# Altium PCB PCB_meteo.PcbDoc
Units mm, origin at the board's own origin, x right, y up, seen from the top; angles counter-clockwise.
Board outline 50 x 50 mm, 4 copper layers (Top Layer, Internal Plane 1, Internal Plane 2, Bottom Layer); 29 components, 11 nets, 131 pads, 28 vias.
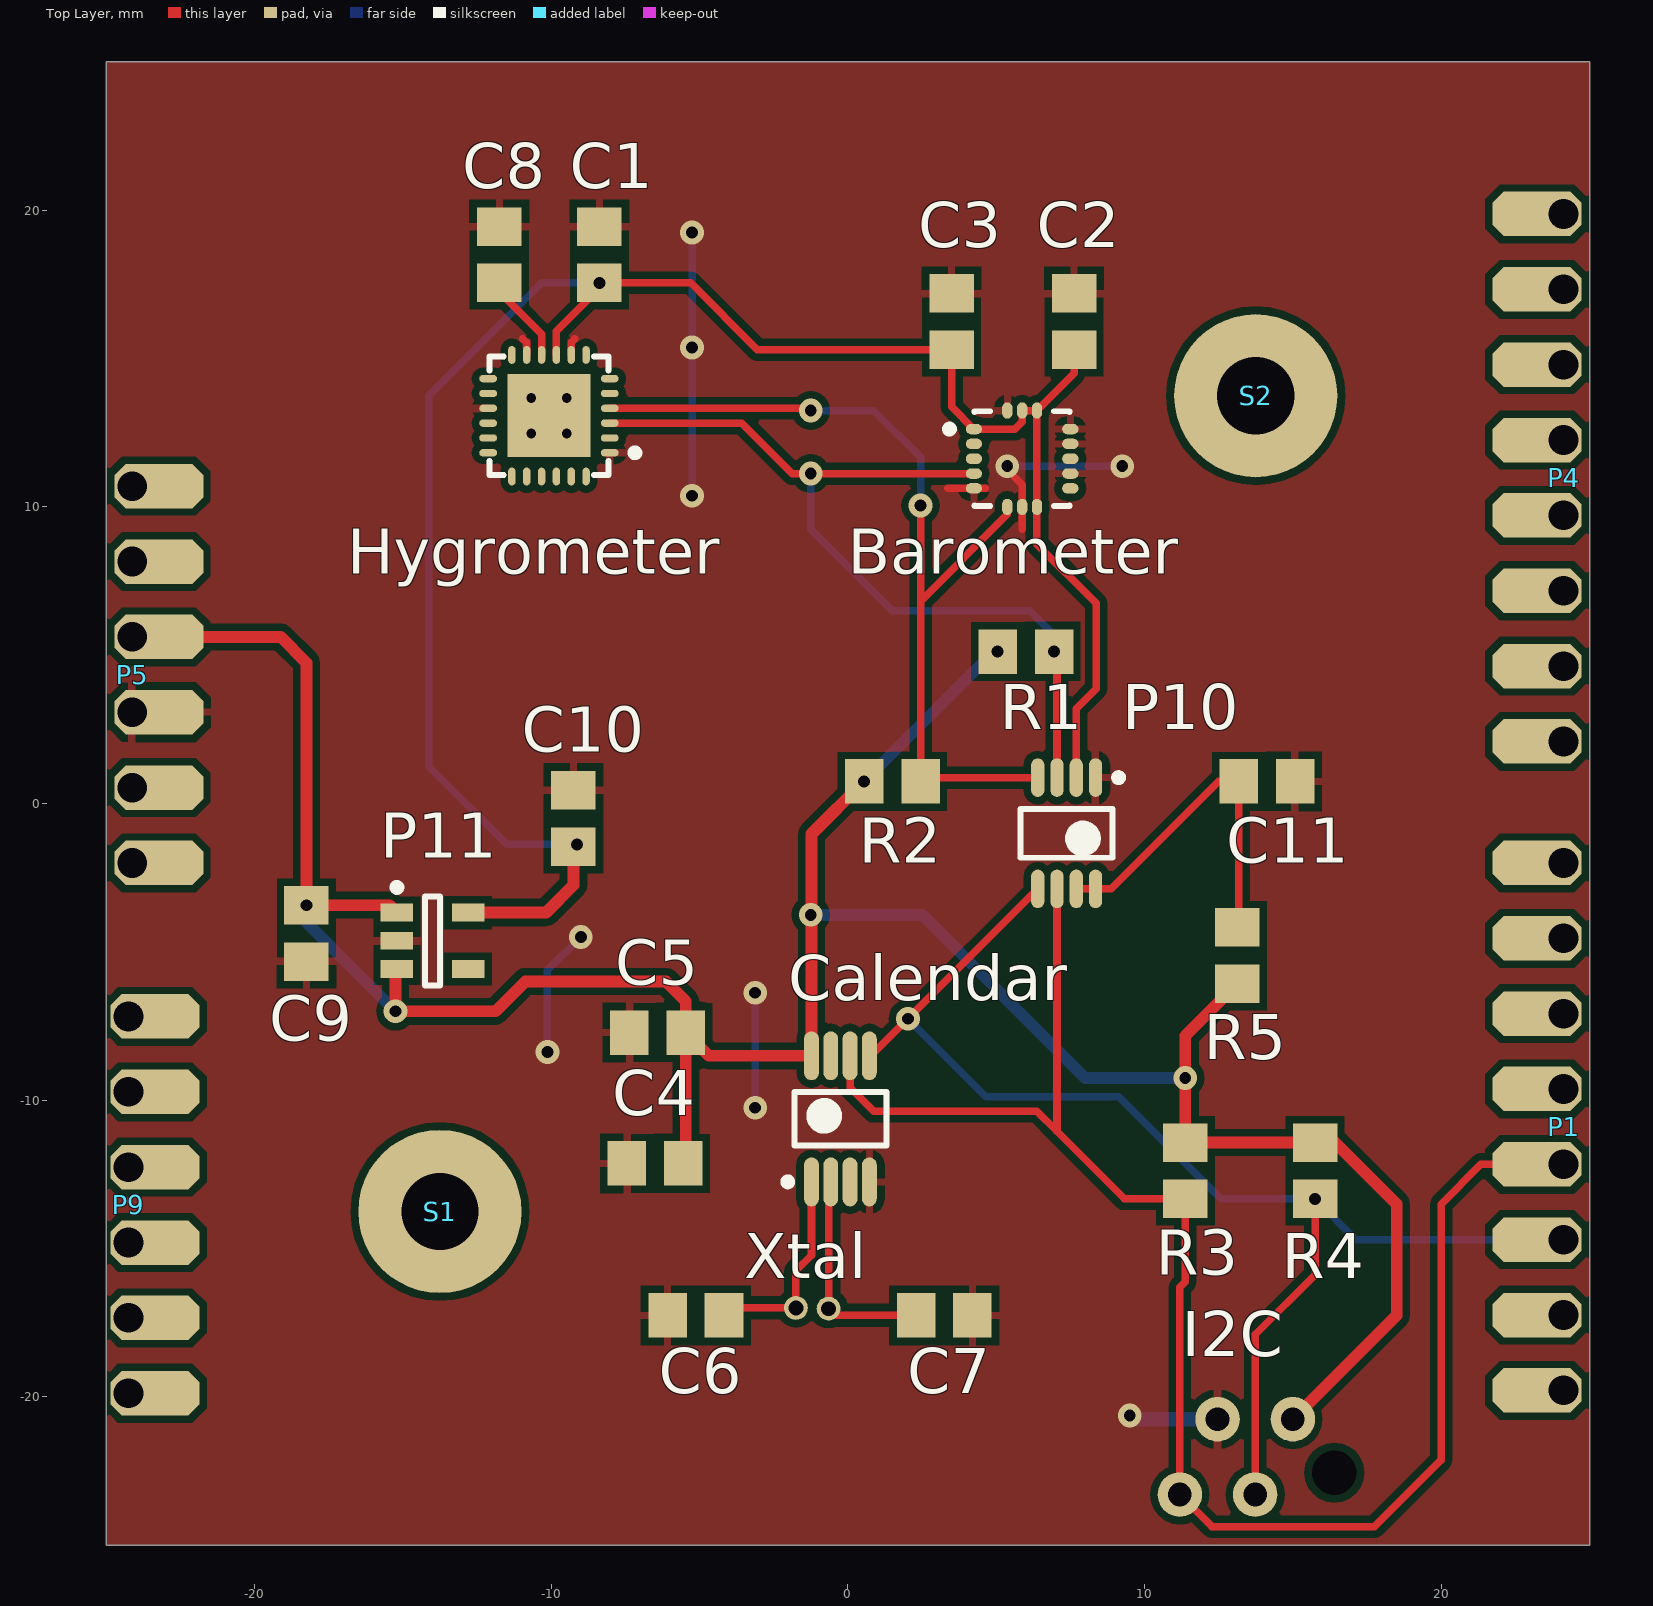
[diagram p0: Top Layer view]
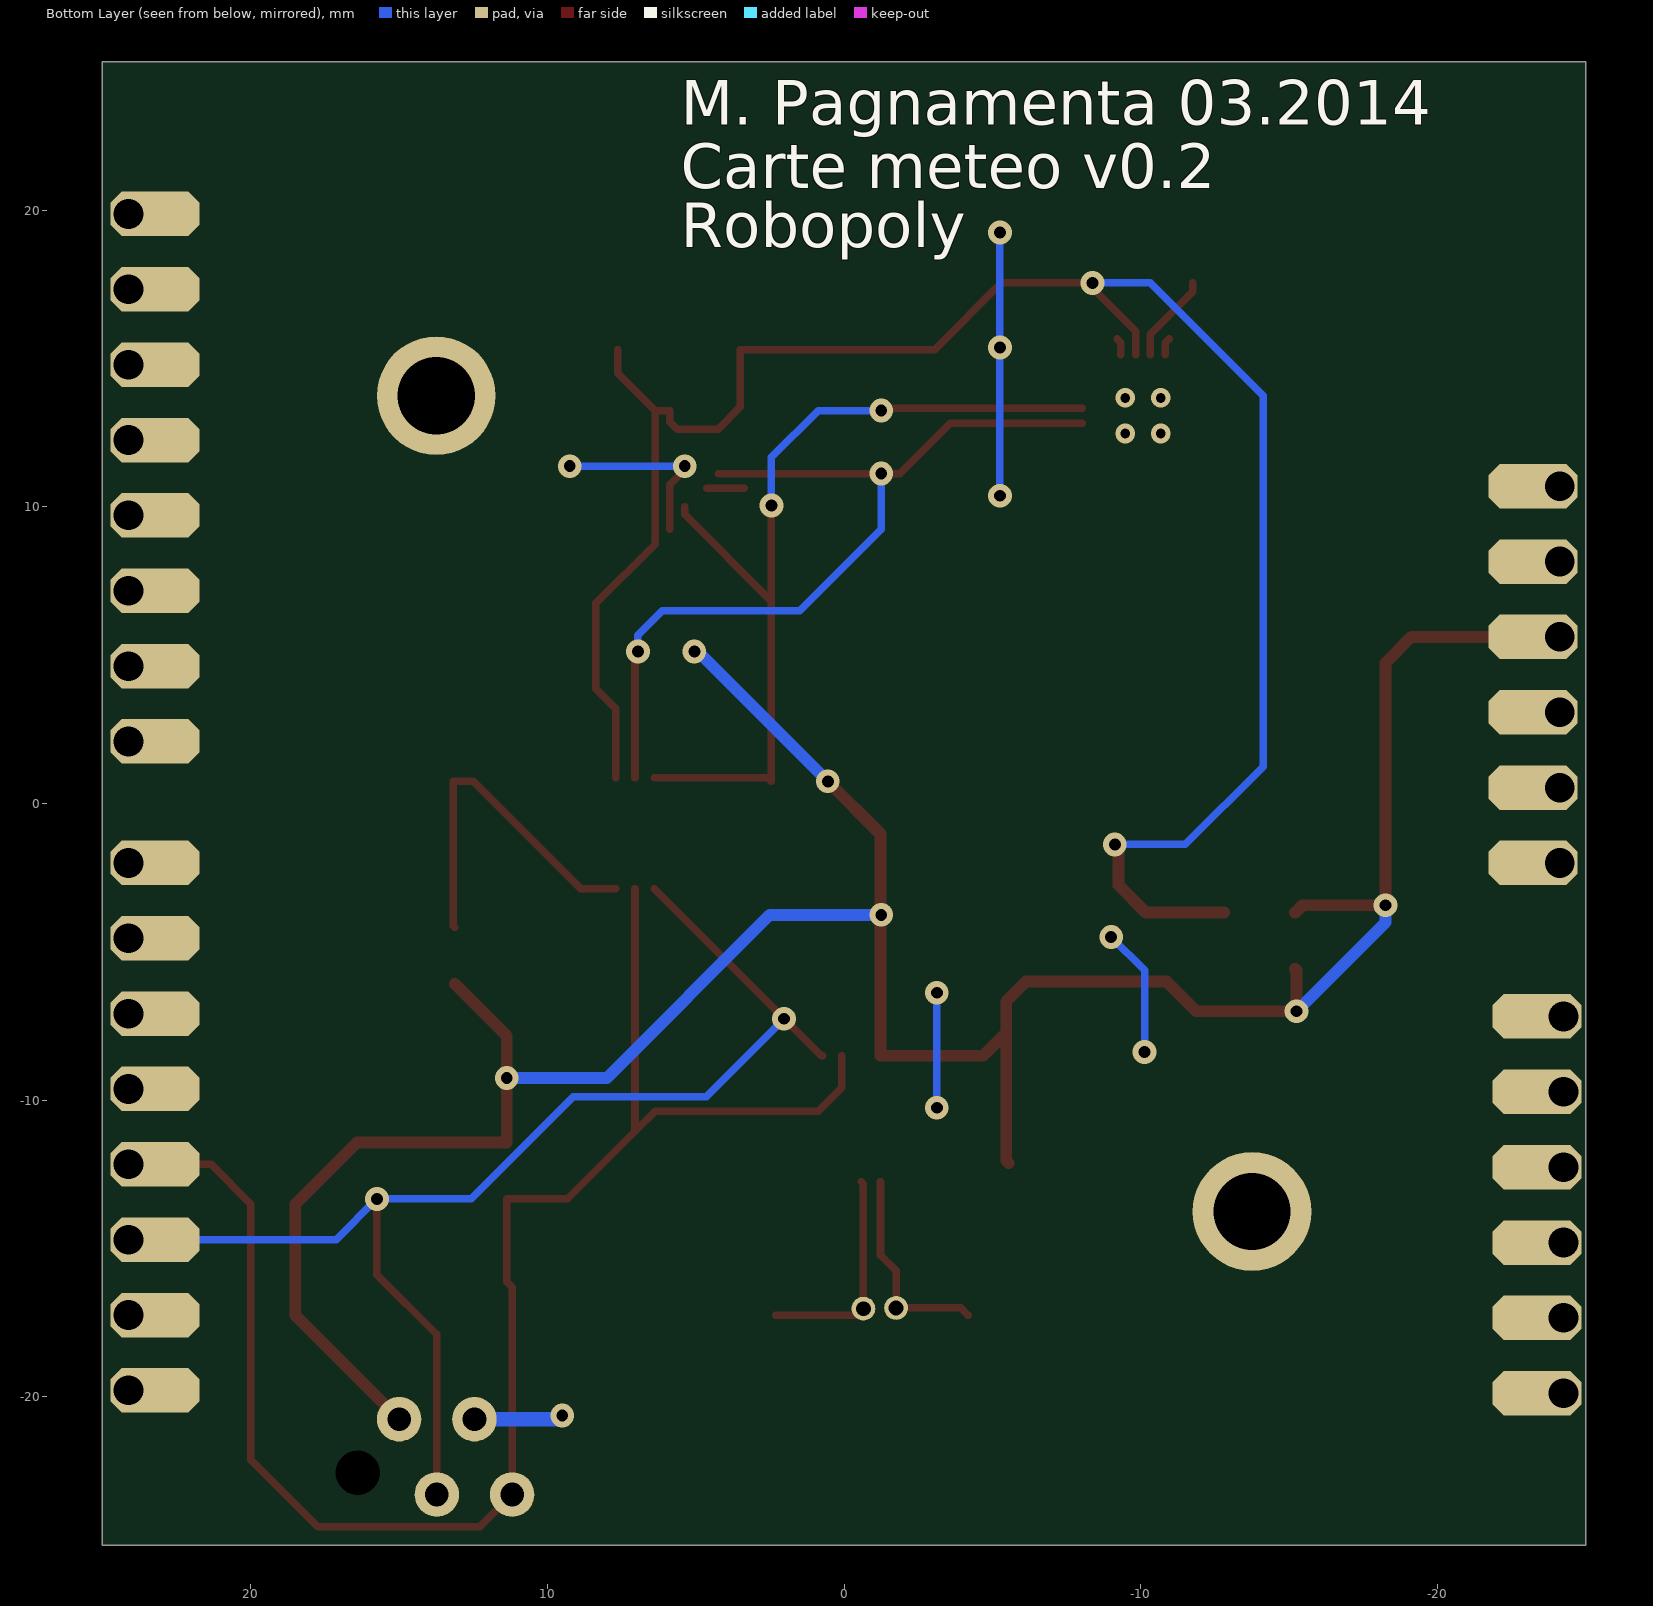
[diagram p1: Bottom Layer view, seen from below]
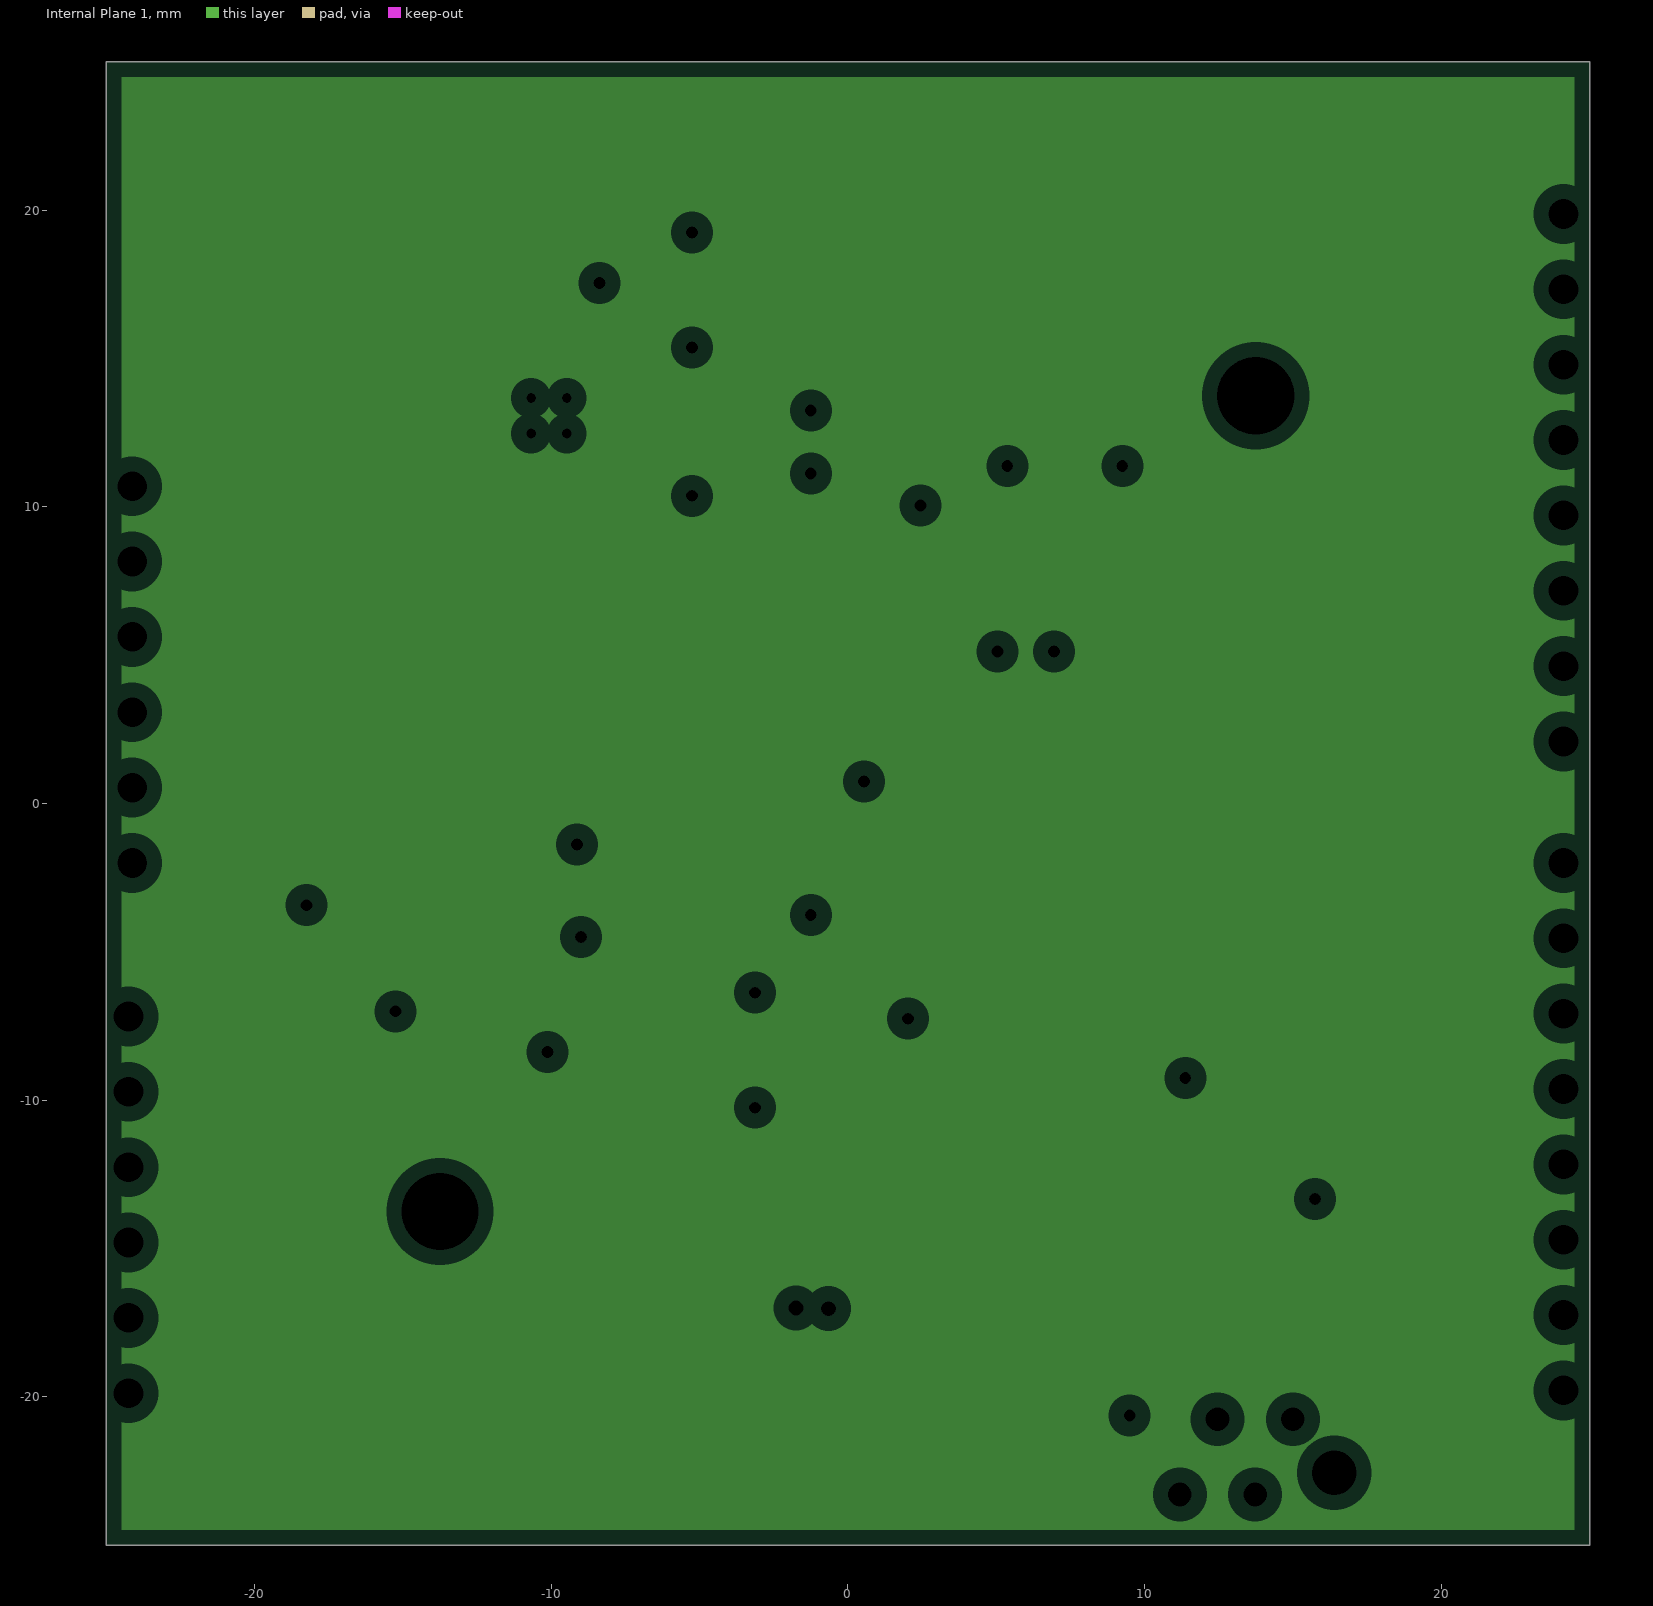
[diagram p2: Internal Plane 1, clearances drawn from the general rule]
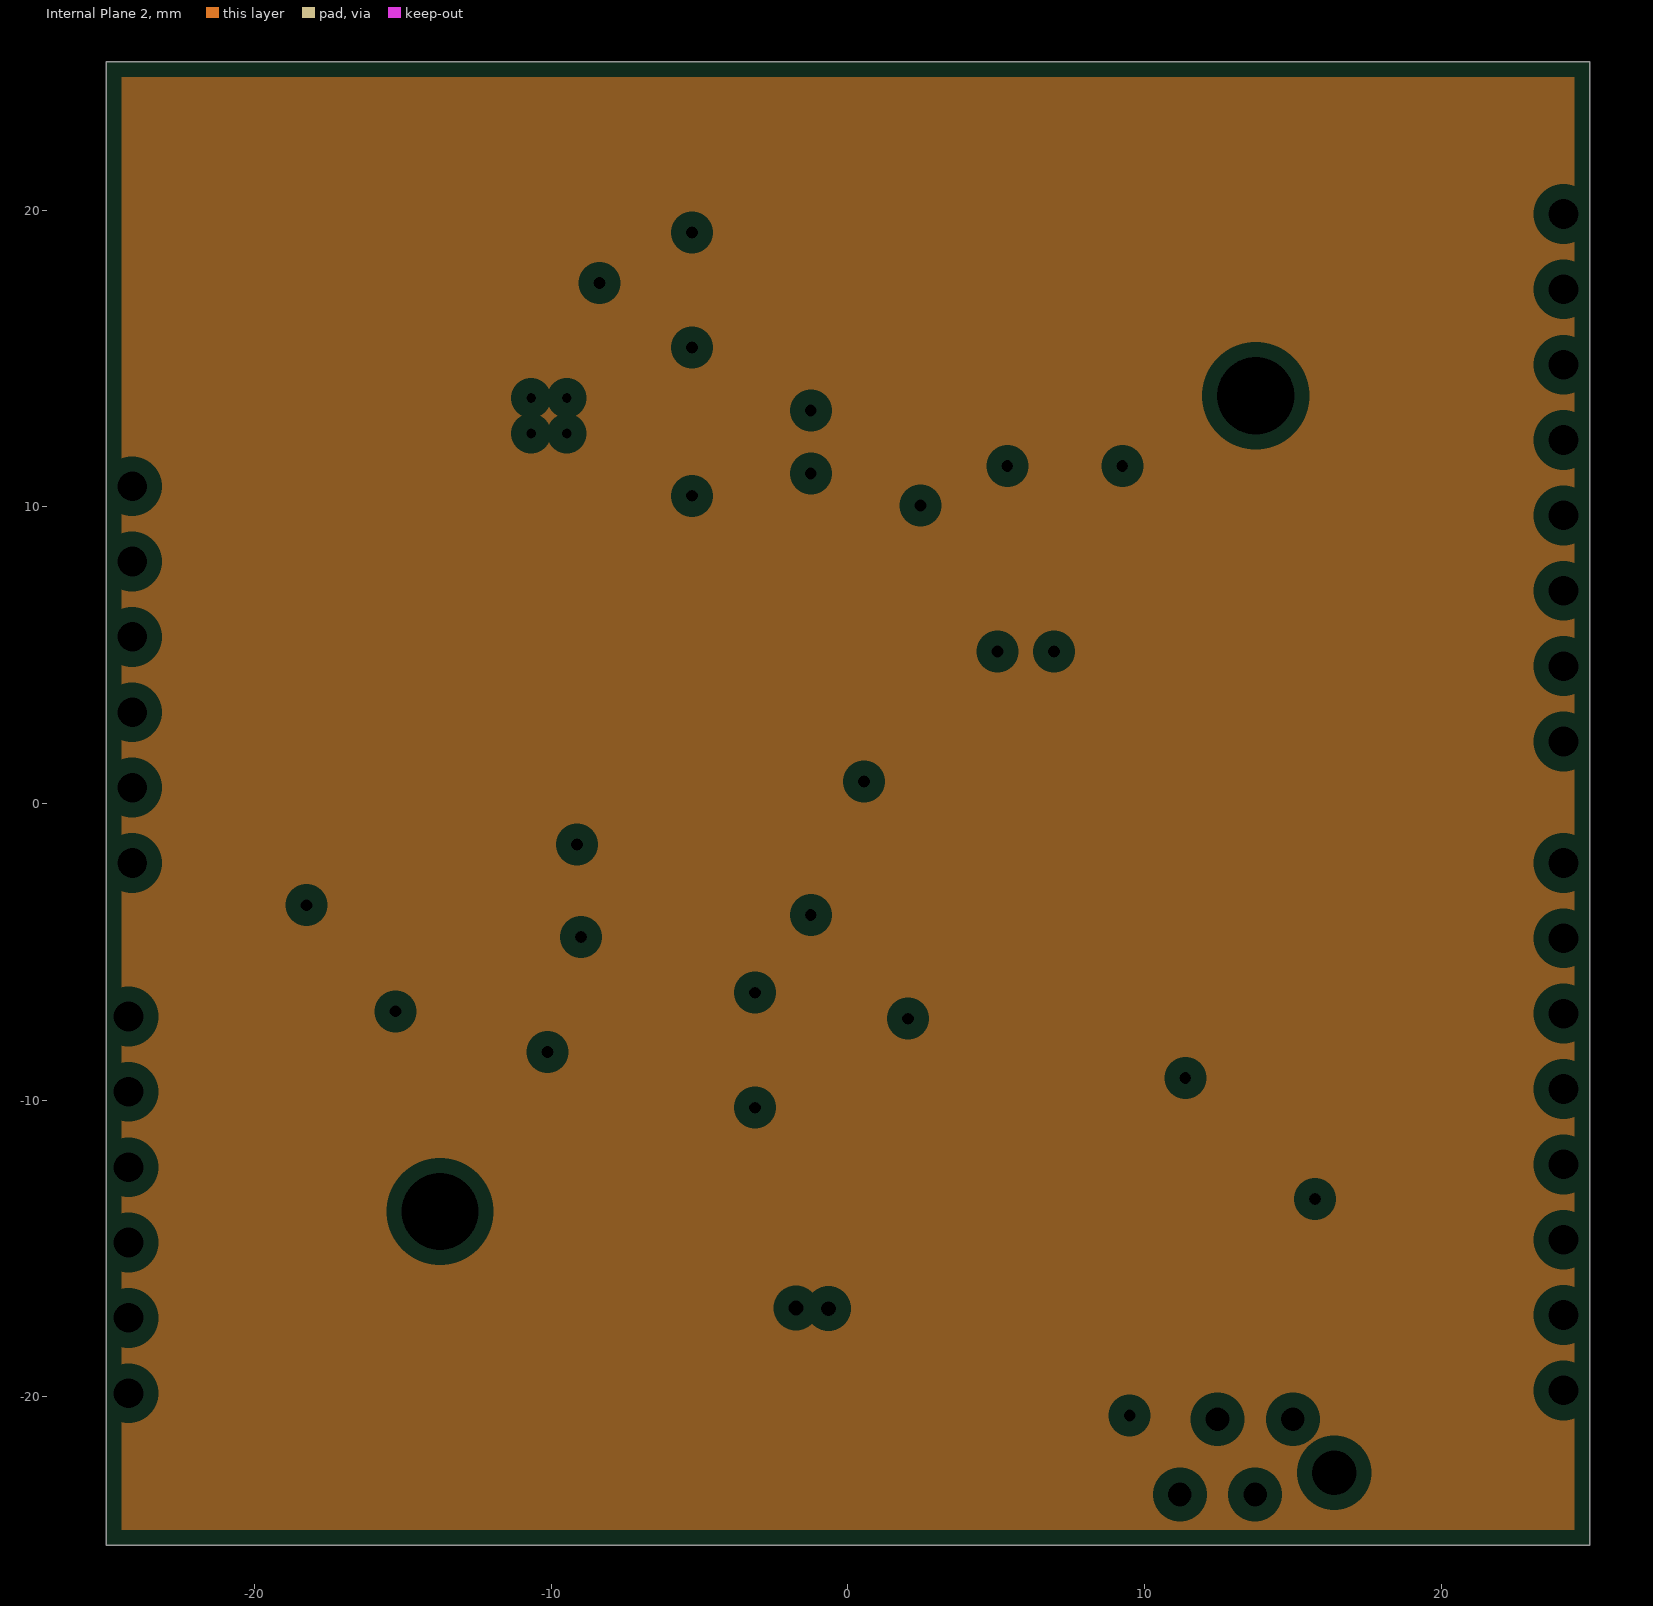
[diagram p3: Internal Plane 2, clearances drawn from the general rule]
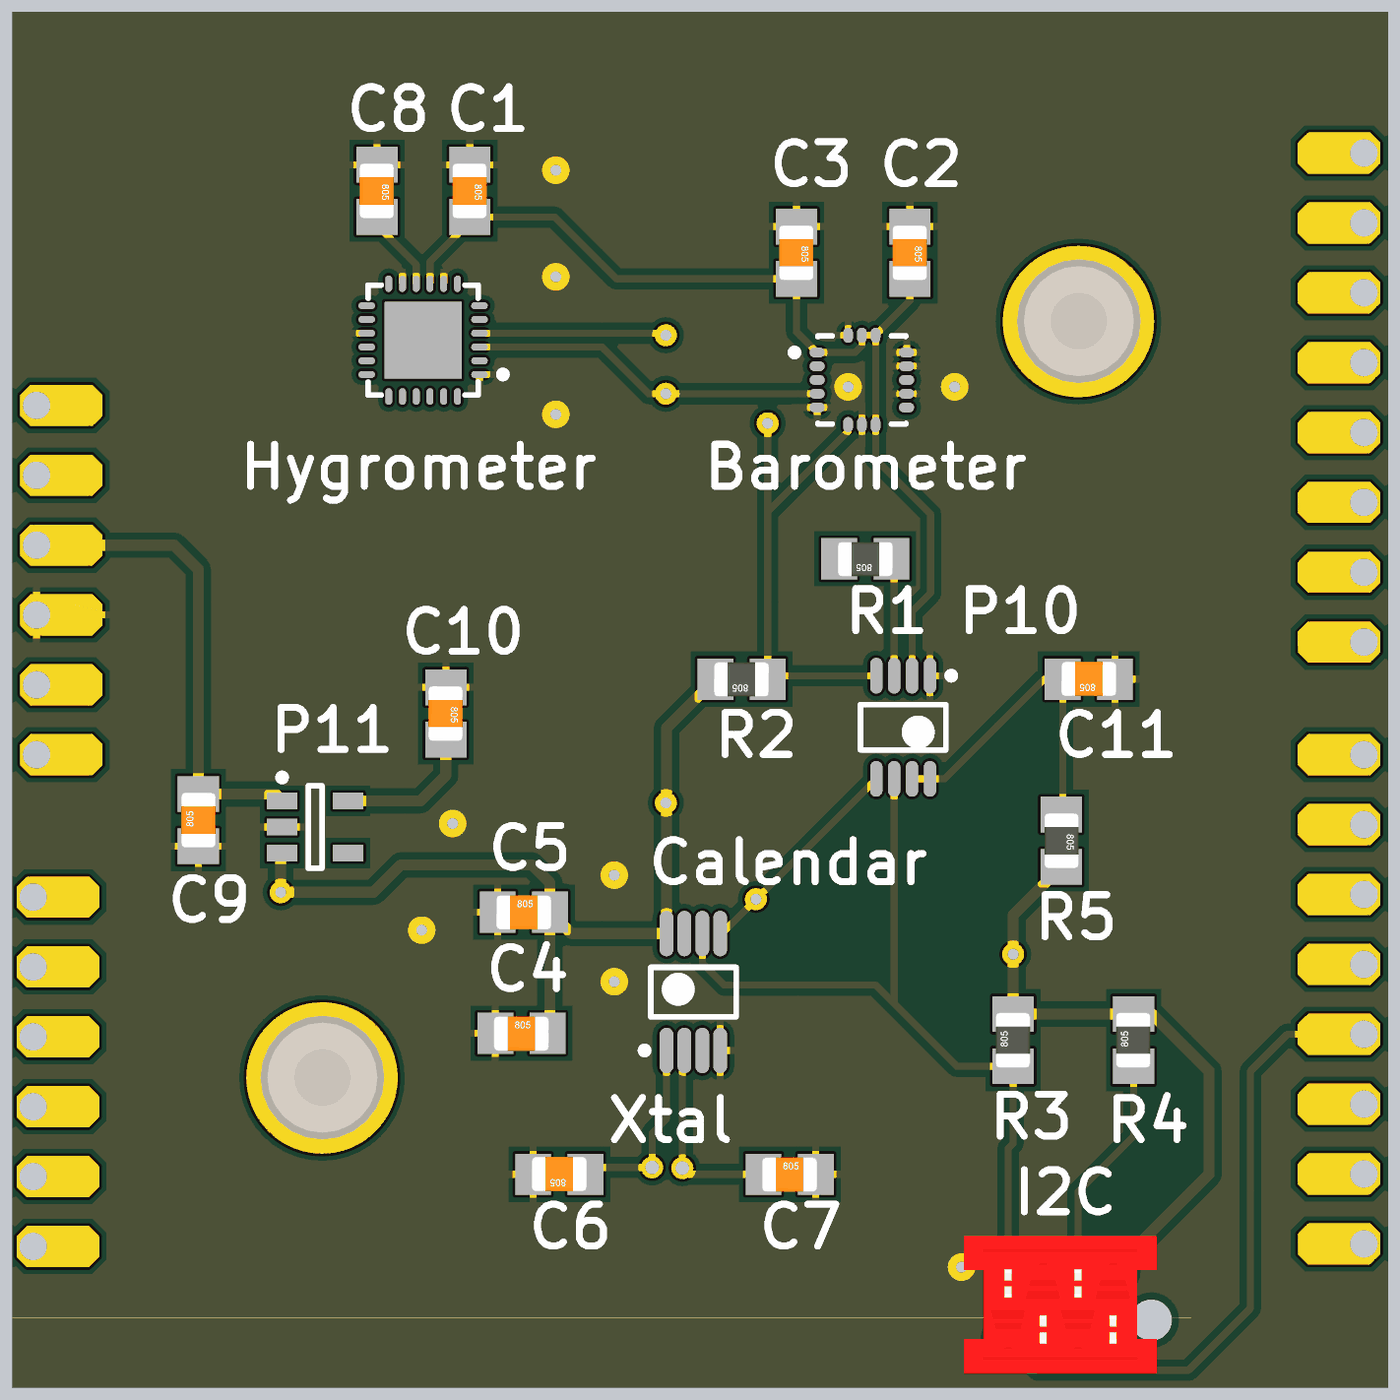
[diagram p4: 3D render of the assembled board from above, using the file's embedded part models]

## Layer stack, top to bottom
Top Layer: signal copper 0.0356
Dielectric: dielectric 0.32, FR-4, Dk 4.8
Internal Plane 1: plane copper 0.0356
Dielectric: dielectric 0.32, FR-4, Dk 4.8
Internal Plane 2: plane copper 0.0356
Dielectric: dielectric 0.32, FR-4, Dk 4.8
Bottom Layer: signal copper 0.0356

## Board outline
-25,-25 25,-25 25,25 -25,25

## Design rules (kind name [scope] priority, off if disabled: settings)
Clearance Clearance_Polygons [InPolygon] p1: gap=0.254
Clearance [All] p2: gap=0.15
HoleSize [All] p1: absolutevalues=TRUE maxlimit=6.2 minlimit=0.3 maxpercent=80.000 minpercent=20.000
MinimumSolderMaskSliver [All] p1 off: minsoldermaskwidth=0.15
PlaneClearance [All] p1: clearance=0.508
PlaneConnect [All] p1: planeconnectstyle=Relief reliefexpansion=0.508 reliefentries=4 reliefconductorwidth=0.254 reliefairgap=0.254
PolygonConnect PolygonConnect_via [All vs IsVia] p1: connectstyle=Direct reliefconductorwidth=0.254 reliefentries=4 polygonreliefangle="90 Angle"
PolygonConnect [All] p2: connectstyle=Relief reliefconductorwidth=0.254 reliefentries=4 polygonreliefangle="90 Angle"
RoutingVias [All] p1: holewidth=0.5 width=0.8 viastyle="Through Hole" minholewidth=0.35 minwidth=0.5 maxholewidth=1.5 maxwidth=2
SilkToSilkClearance [All] p1 off: silktosilkclearance=0.254
SilkscreenOverComponentPads [All] p1 off: minsilkscreentomaskgap=0.254
SolderMaskExpansion [All] p1: expansion=0.1
Width [All] p1: maxlimit=5 minlimit=0.2 preferedwidth=0.5
22 further rules are at their usual default settings.

## Components (designator, comment, footprint, x,y, rotation, side; value= is the part's Value field where it differs from the comment)
Barometer "Header 2" HCLGA-16L 5.875,11.625 r0 top (schematic designator P6)
C1 "C/0805/100nF" C/0805 -8.375,18.5 r270 top
C2 "C" C/0805 7.625,16.25 r270 top
C3 "C" C/0805 3.5,16.25 r270 top
C4 "C/0805/100nF" C/0805 -6.5,-12.125 r0 top
C5 "C/0805/100nF" C/0805 -6.412,-7.72 r0 top
C6 "C" C/0805 -5.125,-17.25 r180 top
C7 "C" C/0805 3.25,-17.25 r0 top
C8 "C/0805/100nF" C/0805 -11.75,18.5 r270 top
C9 "C/0805/100nF" C/0805 -18.25,-4.375 r90 top
C10 "C/0805/100nF" C/0805 -9.25,-0.5 r270 top
C11 "C/0805/100nF" C/0805 14.125,0.75 r180 top
Calendar "Header 2" PCA8565TS -0.25,-10.625 r90 top (schematic designator P7)
Hygrometer "Header 2" Si7005 -12.125,15.125 r180 top (schematic designator P3)
I2C "I2C" TYCO/215079-4 15,-20.75 r0 top (schematic designator P2)
P1 "Header 8" "Arduino Pad 8" 24.125,-2 r180 top
P4 "Header 8" "Arduino Pad 8" 24.125,19.875 r180 top
P5 "Header 6" "Arduino Pad 6" -24.125,-2 r0 top
P9 "Header 6" "Arduino Pad 6" -24.25,-19.875 r0 top
P10 "Header 2" PCA9306DP1 7.375,-1 r270 top
P11 "Header 2" TLV70033DDCR -14,-4.625 r0 top
R1 "10kOhm" R/0805 6,5.125 r180 top
R2 "10kOhm" R/0805 1.5,0.75 r180 top
R3 "10kOhm" R/0805 11.375,-12.375 r90 top
R4 "10kOhm" R/0805 15.75,-12.375 r90 top
R5 "100kOhm" R/0805 13.125,-5.125 r270 top
S1 "SCREW" HW/SCREW/M2_5 -13.75,-13.75 r0 top
S2 "SCREW" HW/SCREW/M2_5 13.75,13.75 r0 top
Xtal "Header 2" Quartz -1.75,-17 r0 top (schematic designator P8)

## Footprints (in the part's own frame and the unit in brackets; to place one, negate y for a bottom-side part, rotate by r counter-clockwise, add the part's x,y. Pads: shape width x height; smd on the part's side, far side on the other; paste and mask are expansions set on the pad)
"Arduino Pad 6" [mm]
  oct 3x1.5 hole 1 copper offset 0.9,0: 1(0,0) 2(0,2.54) 3(0,5.08) 4(0,7.62) 5(0,10.16) 6(0,12.7)
"Arduino Pad 8" [mm]
  oct 3x1.5 hole 1 copper offset 0.9,0: 1(0,0) 2(0,2.54) 3(0,5.08) 4(0,7.62) 5(0,10.16) 6(0,12.7) 7(0,15.24) 8(0,17.78)
C/0805 [mm] "Chip Resistor; Body 2.0 x 1.3 mm (LxW typ)"
  rect 1.3x1.5 smd: 1(-0.95,0) 2(0.95,0)
  body extent -1,-0.64 1,0.62, height 0.78
HCLGA-16L [mm]
  oval 0.55x0.35 smd: 1(-1.625,1) 2(-1.625,0.5) 3(-1.625,0) 4(-1.625,-0.5) 5(-1.625,-1) 9(1.625,-1) 10(1.625,-0.5) 11(1.625,0) 12(1.625,0.5) 13(1.625,1)
  oval 0.35x0.55 smd: 6(-0.5,-1.625) 7(0,-1.625) 8(0.5,-1.625) 14(0.5,1.625) 15(0,1.625) 16(-0.5,1.625)
  silkscreen extent -2.57,-1.6 1.6,1.6, body extent -1.58,-1.58 1.58,1.58, height 1
HW/SCREW/M2_5 [mm]
  round 5.5 / inner round 4 / far side round 4 hole 2.6: 1(0,0)
  body extent -2.24,-2.24 2.26,2.26, height 2.5
PCA8565TS [mm] "calendar"
  oval 1.65x0.5 smd: 1(-2.125,0.975) 2(-2.125,0.325) 3(-2.125,-0.325) 4(-2.125,-0.975) 5(2.125,-0.975) 6(2.125,-0.325) 7(2.125,0.325) 8(2.125,0.975)
  silkscreen extent -2.25,-1.55 0.9,1.9, body extent -1.55,-1.55 1.55,1.55, height 0.28
PCA9306DP1 [mm] "I2C voltage translator"
  oval 1.3x0.45 smd: 1(-1.875,0.975) 2(-1.875,0.325) 3(-1.875,-0.325) 4(-1.875,-0.975) 5(1.875,-0.975) 6(1.875,-0.325) 7(1.875,0.325) 8(1.875,0.975)
  silkscreen extent -2,-1.55 0.82,1.88, body extent -1.55,-1.55 1.55,1.55, height 1.1
Quartz [mm]
  round 0.8 hole 0.5: 1(0,0) 2(1.1,-0.025)
R/0805 [mm] "Chip Resistor; Body 2.0 x 1.3 mm (LxW typ)"
  rect 1.3x1.5 smd: 1(-0.95,0) 2(0.95,0)
  body extent -1,-0.62 1,0.64, height 0.78
Si7005 [mm] "RAH sensor"
  oval 0.6x0.25 smd: 1(-4.1,3.3) 2(-4.1,2.8) 3(-4.1,2.3) 4(-4.1,1.8) 5(-4.1,1.3) 6(-4.1,0.8) 13(0,0.8) 14(0,1.3) 15(0,1.8) 16(0,2.3) 17(0,2.8) 18(0,3.3)
  oval 0.25x0.6 smd: 7(-3.3,0) 8(-2.8,0) 9(-2.3,0) 10(-1.8,0) 11(-1.3,0) 12(-0.8,0) 19(-0.8,4.1) 20(-1.3,4.1) 21(-1.8,4.1) 22(-2.3,4.1) 23(-2.8,4.1) 24(-3.3,4.1)
  rect 2.8x2.8 smd: 25(-2.05,2.05)
  silkscreen extent -5.08,0.05 -0.05,4.05, body extent -4.05,0.05 -0.05,4.05, height 1.4
TLV70033DDCR [mm] "SOT23, 5-Leads, Body 3.0x3.0mm (max), Pitch 0.95mm, IPC Medium Density"
  rect 1.1x0.6 smd: 1(-1.2,0.95) 2(-1.2,0) 3(-1.2,-0.95) 4(1.2,-0.95) 5(1.2,0.95)
  silkscreen extent -1.32,-1.5 0.25,1.92, body extent -0.87,-1.52 0.87,1.53, height 1.1
TYCO/215079-4 [mm]
  round 1.5 hole 0.8: 1(0,0) 2(-1.27,-2.54) 3(-2.54,0) 4(-3.81,-2.54)
  round 1.3 hole 1.5 unplated: 5(1.4,-1.8)
  body extent -5.41,-3.74 1.6,1.26, height 4

## Part data
Barometer: library part "Barometer LPS331AP", "Header, 2-Pin"
C1 C2 C3 C4 C5 C6 C7 C8 C9 C10 C11: "Capacitor"
Calendar: library part PCA8565, "Header, 2-Pin"
Hygrometer: library part Si7005, "Header, 2-Pin"
I2C: library part Micromatch-I2C, "Micromatch I2C Connector"
P1 P4: "Header, 8-Pin"
P5 P9: "Header, 6-Pin"
P10: library part PCA9306DP1, "Header, 2-Pin"
P11: library part TLV700xx, "Header, 2-Pin"
R1 R2 R3 R4 R5: library part R, "Resistor"
Xtal: library part Xtal32768khz, "Header, 2-Pin"

## Via types
v1: diameter 0.8, hole 0.4, Top Layer to Bottom Layer, 24 vias
v2: diameter 0.66, hole 0.33, Top Layer to Bottom Layer, tented top, 4 vias

## Nets (pads, with @x,y where several pads share a name; then routed paths per layer and width w, separated by ;. In a path a pad name is that pad's centre, name@x,y a point inside that pad or via, vN(x,y) a via of type N, cw(c..) or ccw(c..) an arc to the next point about the centre after c; other vN are vias at no path point)
3V3: Barometer.1 Barometer.8 Barometer.14 Barometer.15 C1.2 C2.2 C3.2 C10.2 Hygrometer.9 P10.2 P11.5 | length 68.6
  Top Layer w0.254: Hygrometer.9 -9.825,15.925 -8.375,17.375 v1(-8.375,17.55) -5.3,17.55 -3.05,15.3 C3.2 3.5,13.375 Barometer.1 5.625,12.625 5.875,12.875 Barometer.15 Barometer.14 ; C2.2 7.625,14.5 Barometer.14 ; P10.2 7.7,3.2 8.375,3.875 8.375,6.75 6.375,8.75 Barometer.8 Barometer.14
  Top Layer w0.4: P11.5 -10.175,-3.675 -9.25,-2.75 C10.2
  Bottom Layer w0.254: v1(-9.125,-1.375) -11.5,-1.375 -14.125,1.25 -14.125,13.75 -10.325,17.55 v1(-8.375,17.55)
GND: Barometer.5 Barometer.7 Barometer.10 Barometer.12 Barometer.13 Barometer.16 C1.1 C2.1 C3.1 C4.1 C5.1 C6.2 C7.2 C8.1 C9.1 C10.1 C11.1 Calendar.4 Hygrometer.1 Hygrometer.8 Hygrometer.11 Hygrometer.15 I2C.3 P5.3 P10.1 P11.2 | length 28.3
  Top Layer w0.254: -10.952,15.661 -10.825,15.534 Hygrometer.11 ; Hygrometer.8 -9.325,15.534 -9.198,15.661 ; 3.375,10.625 Barometer.5 4.635,10.625 ; 5.625,11 5.875,10.75 Barometer.7 5.875,9.25
  Bottom Layer w0.254: v1(-10.125,-8.375) -10.125,-5.625 v1(-9,-4.5) ; v1(-5.25,10.375) v1(-5.25,15.375) v1(-5.25,19.25) ; v1(-3.125,-10.25) v1(-3.125,-6.375) ; v1(5.375,11.375) v1(9.25,11.375)
  Bottom Layer w0.5: v1(9.5,-20.625) 9.625,-20.75 I2C.3
NetC6_1: C6.1 Calendar.1 Xtal.1 | length 7
  Top Layer w0.254: C6.1 -3.925,-17 Xtal.1 -1.75,-15.75 -1.225,-15.225 Calendar.1
NetC7_1: C7.1 Calendar.2 Xtal.2 | length 7.3
  Top Layer w0.254: Calendar.2 -0.65,-12.825 Xtal.2 -0.425,-17.25 C7.1
NetC8_2: C8.2 Hygrometer.10 | length 3
  Top Layer w0.254: C8.2 -11.75,17.25 -10.325,15.825 Hygrometer.10
NetC11_2: C11.2 P10.7 P10.8 R5.1 | length 11.9
  Top Layer w0.254: P10.7 P10.8 8.875,-2.875 12.5,0.75 C11.2 13.175,-4.125 R5.1
SCL: Calendar.6 I2C.4 P1.5 P10.6 R3.1 | length 55.6
  Top Layer w0.254: Calendar.6 0.075,-9.575 0.875,-10.375 6.375,-10.375 7.05,-11.05 ; P10.6 7.05,-11.05 ; P1.5 21.34,-12.16 20,-13.5 20,-22.125 17.75,-24.375 12.275,-24.375 I2C.4 11.19,-16.31 11.375,-16.125 R3.1 9.325,-13.325 7.05,-11.05
SCL3V3: Barometer.4 Hygrometer.3 P10.3 R1.1 | length 29.4
  Top Layer w0.254: Hygrometer.3 -3.575,12.825 -1.875,11.125 v1(-1.25,11.125) Barometer.4 ; v1(6.95,5.125) 7.05,5.025 P10.3
  Bottom Layer w0.254: v1(-1.25,11.125) -1.25,9.25 1.5,6.5 6.125,6.5 6.95,5.675 v1(6.95,5.125)
SDA: Calendar.5 I2C.2 P1.6 P10.5 R4.1 | length 44
  Top Layer w0.254: Calendar.5 0.775,-8.5 v1(2.025,-7.25) P10.5 ; I2C.2 13.73,-17.895 15.75,-15.875 v1(15.75,-13.325)
  Bottom Layer w0.254: v1(2.025,-7.25) 4.65,-9.875 9.125,-9.875 12.575,-13.325 v1(15.75,-13.325) 17.125,-14.7 P1.6
SDA3V3: Barometer.6 Hygrometer.4 P10.4 R2.1 | length 30.5
  Top Layer w0.254: Hygrometer.4 -1.325,13.325 v1(-1.25,13.25) ; v1(2.45,10.05) 2.45,6.825 ; Barometer.6 5.375,9.75 2.45,6.825 ; P10.4 2.575,0.875 R2.1 2.45,6.825
  Bottom Layer w0.254: v1(-1.25,13.25) 0.875,13.25 2.45,11.675 v1(2.45,10.05)
VCC: C4.2 C5.2 C9.2 Calendar.8 I2C.1 P5.4 P11.1 P11.3 R1.2 R2.2 R3.2 R4.2 R5.2 | length 98.3
  Top Layer w0.4: P5.4 -19.12,5.62 -18.25,4.75 v1(-18.25,-3.425) -15.45,-3.425 P11.1 ; P11.3 -15.25,-5.625 v1(-15.25,-7) -11.875,-7 -10.875,-6 -6.125,-6 -5.462,-6.663 C5.2 ; C4.2 -5.462,-12.037 C5.2 ; v1(0.55,0.75) -1.225,-1.025 Calendar.8 -4.683,-8.5 C5.2 ; R5.2 11.375,-7.825 v1(11.375,-9.25) R3.2 R4.2 16.425,-11.425 18.5,-13.5 18.5,-17.25 I2C.1
  Bottom Layer w0.4: v1(-18.25,-3.425) -18.25,-4 v1(-15.25,-7) ; v1(-1.25,-3.75) 2.5,-3.75 8,-9.25 v1(11.375,-9.25) ; v1(0.55,0.75) 4.925,5.125 v1(5.05,5.125)
pads on no net: Barometer.2 Barometer.3 Barometer.9 Barometer.11 Calendar.3 Calendar.7 Hygrometer.2 Hygrometer.5 Hygrometer.6 Hygrometer.7 Hygrometer.12 Hygrometer.13 Hygrometer.14 Hygrometer.16 Hygrometer.17 Hygrometer.18 Hygrometer.19 Hygrometer.20 Hygrometer.21 Hygrometer.22 Hygrometer.23 Hygrometer.24 Hygrometer.25 I2C.5 P1.1 P1.2 P1.3 P1.4 P1.7 P1.8 P4.1 P4.2 P4.3 P4.4 P4.5 P4.6 P4.7 P4.8 P5.1 P5.2 P5.5 P5.6 P9.1 P9.2 P9.3 P9.4 P9.5 P9.6 P11.4 S1.1 S2.1
copper on no net:
  other v2: -10.675,12.475 -9.475,12.475 -10.675,13.675 -9.475,13.675

## Polygon pours and split planes (outlines as drawn)
GND on Top Layer "GND" (solid, remove dead copper, pour order 2): -25,25 -25,-25 25,-25 25,25
no net on Internal Plane 1 (split plane): 24.49,-24.49 -24.49,-24.49 -24.49,24.49 24.49,24.49
no net on Internal Plane 2 (split plane): 24.49,-24.49 -24.49,-24.49 -24.49,24.49 24.49,24.49

## Silkscreen, mask and mechanical layers (free items; w line width, h text height)
Bottom Overlay:
  text "M. Pagnamenta 03.2014" at 5.5,22.875 h1.5
  text "Carte meteo v0.2" at 5.5,20.75 h1.5
  text "Robopoly" at 5.5,18.75 h1.5
Mechanical 1:
  the board outline again, w0.254